# EAGLE board tinkercad_design (EAGLE 9.7.0)

Size 142.08 x 127.72 mm. Coordinates in mm from the lower left corner, seen from the top.
Outline: 0,0 142.08,0 142.08,127.72 0,127.72 0,0
Copper layers (1*16): Top 0.035mm / dielectric 1.5mm / Bottom 0.035mm
Design rules "default": minimum track width 6mil, minimum drill 0.35mm, track to track 6mil, track to pad 6mil, pad to pad 6mil, via to via 6mil, smd to smd 6mil, copper to edge 40mil, drill to drill 6mil, minimum pad ring 10mil, minimum via ring 8mil, stop-mask expansion 4mil, vias tented up to drill 0mil, thermal gap 10mil

## Footprints (pad centres in the part's own frame; a part is rotated, then mirrored left to right if it is on the bottom)
LEDRD254W60D565H860B = drill 0.981 pad 1.581: 1 -1.27,0; 2 1.27,0
LEDRD254W60D565H860B_W = drill 0.981 pad 1.581: 1 -1.27,0; 2 1.27,0
PIEZO = drill 1 pad 1.6: 1 -3.5,0; 2 3.5,0
RESAD1016W63L850D250B = drill 0.83 pad 1.43: 1 -5.08,0; 2 5.08,0
SWITCH-MOMENTARY-PTH-6.5MM = drill 1.016 pad 1.88: 1 -3.251,2.261; 2 3.251,2.261; 3 -3.251,-2.261; 4 3.251,-2.261
ARDUINO-UNO-R3-SHIELD = drill 1.016 pad 1.88: 3.3V 24.13,-2.54; 5V 24.13,0; A0 24.13,12.7; A1 24.13,15.24; A2 24.13,17.78; A3 24.13,20.32; A4 24.13,22.86; A5 24.13,25.4; AREF -24.13,-13.97; D2 -24.13,20.32; D3 -24.13,17.78; D4 -24.13,15.24; D5 -24.13,12.7; D6 -24.13,10.16; D7 -24.13,7.62; D8 -24.13,3.81; D9 -24.13,1.27; D10 -24.13,-1.27; D11 -24.13,-3.81; D12 -24.13,-6.35; D13 -24.13,-8.89; GND@0 24.13,2.54; GND@1 24.13,5.08; GND@2 -24.13,-11.43; IOREF 24.13,-7.62; NC 24.13,-10.16; RES 24.13,-5.08; RX -24.13,25.4; SCL -24.13,-19.05; SDA -24.13,-16.51; TX -24.13,22.86; VIN 24.13,7.62

## Placement (x,y rotation side)
D_LED  RED  [LEDRD254W60D565H860B]  25.04,119.81 180 top
DIR_LED  WHITE  [LEDRD254W60D565H860B_W]  134.48,52.47 180 top
PIEZOBUZZ  PIEZO  [PIEZO]  11.73,48.86 0 top
R1  220  [RESAD1016W63L850D250B]  23.21,103.86 90 top
R2  1k  [RESAD1016W63L850D250B]  80.3,8.97 90 top
R3  220  [RESAD1016W63L850D250B]  135.75,47.39 90 top
SIR  SWITCH_MOMENTARY  [SWITCH-MOMENTARY-PTH-6.5MM]  90.46,10.24 90 top
UARDUINO  ARDUINO-UNO-R3-SHIELD  [ARDUINO-UNO-R3-SHIELD]  75.31,77.7 270 top

## Library data of the parts
D_LED = Tinkercad; CATEGORY: Opto-Electronic; SUB-CATEGORY: LED; VALUE: LED_RED
DIR_LED = Tinkercad; CATEGORY: Opto-Electronic; SUB-CATEGORY: LED; VALUE: LED_WHITE
PIEZOBUZZ R1-R3 SIR UARDUINO = Tinkercad

## Nets
D_LED_C: D_LED.2 R1.2
DIR_LED_A: DIR_LED.1 R3.2
UARDUINO_5V: R3.1 SIR.3 SIR.4 UARDUINO.5V
UARDUINO_D2: R2.1 SIR.1 SIR.2 UARDUINO.D2
UARDUINO_D8: PIEZOBUZZ.1 UARDUINO.D8
UARDUINO_D13: D_LED.1 UARDUINO.D13
UARDUINO_GND: DIR_LED.2 PIEZOBUZZ.2 R1.1 R2.2 UARDUINO.GND@0 UARDUINO.GND@1 UARDUINO.GND@2

## Tracks (layer width: path | path; a pad name or v marks a point on that pad's centre or on a via)
D_LED_C  (1 unrouted)
DIR_LED_A  (1 unrouted)
UARDUINO_5V  (3 unrouted)
UARDUINO_D2  (3 unrouted)
UARDUINO_D8  (1 unrouted)
UARDUINO_D13  (1 unrouted)
UARDUINO_GND  (6 unrouted)